# Altium PCB HDC2022.PcbDoc
Units mm, origin at the board's own origin, x right, y up, seen from the top; angles counter-clockwise.
Board outline 25 x 15 mm, 2 copper layers (Top Layer, Bottom Layer), stack 1.569 mm thick; 22 components, 10 nets, 63 pads, 46 vias.
Unrouted connection lines stored in the file: 11.
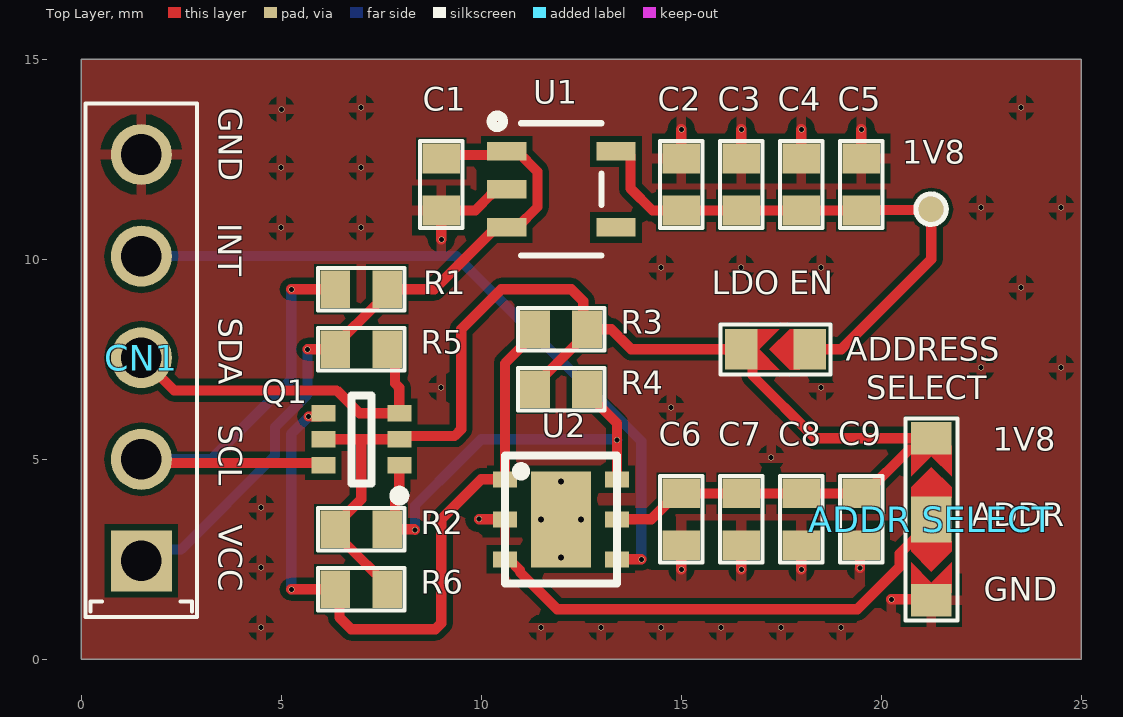
[diagram p0: Top Layer view]
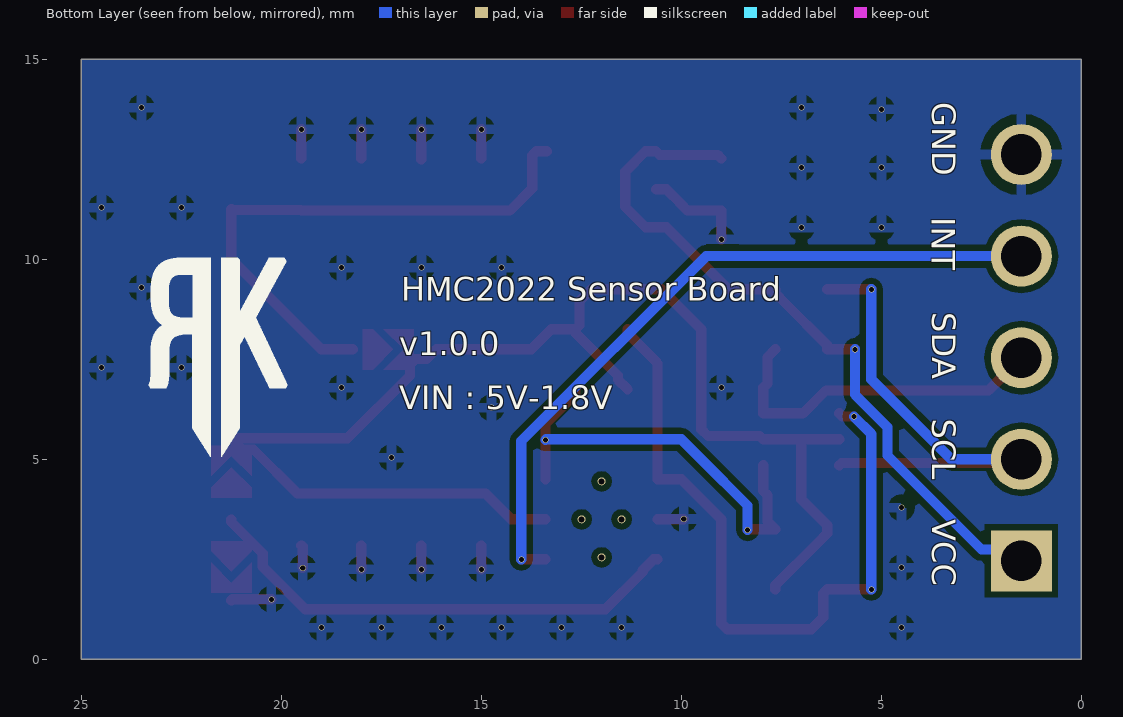
[diagram p1: Bottom Layer view, seen from below]
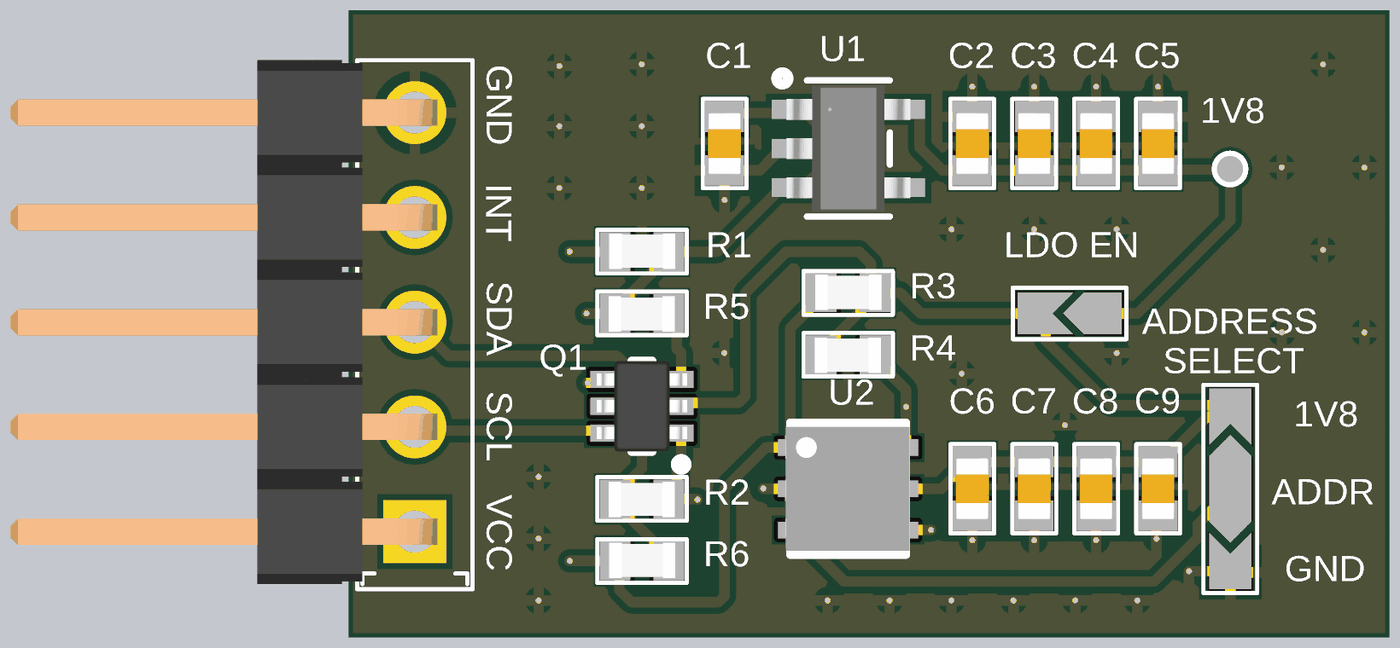
[diagram p2: 3D render of the assembled board from above, using the file's embedded part models]

## Layer stack, top to bottom
Top Solder: solder mask 0.0254, SM-001, Dk 4
Top Layer: signal copper 0.035
Dielectric 1: core 1.4986, Core-043, Dk 4.3
Bottom Layer: signal copper 0.035
Bottom Solder: solder mask 0.0254, SM-001, Dk 4

## Board outline
0,0 25,0 25,15 0,15

## Design rules (kind name [scope] priority, off if disabled: settings)
Clearance [All] p1: gap=0.152 ignorepadtopadclearanceinfootprint=FALSE
PolygonConnect [All] p1: connectstyle=Relief reliefconductorwidth=0.254 reliefentries=4 polygonreliefangle="90 Angle" airgapwidth=0.254
RoutingVias [All] p1: holewidth=0.152 width=0.178 viastyle="Through Hole" minholewidth=0.127 minwidth=0.152 maxholewidth=1.295 maxwidth=1.27
SolderMaskExpansion [All] p1: expansion=0.102 istentingtop=FALSE
Width [All] p1: maxlimit=0.254 minlimit=0.254 preferedwidth=0.254
30 further rules are at their usual default settings.

## Components (designator, comment, footprint, x,y, rotation, side; value= is the part's Value field where it differs from the comment)
1V8 "1v8" TP 21.25,11.25 r90 top (schematic designator TP1)
"ADDR SELECT" "JUMPER_3Pin" "SB_0603 - 3 Pin" 21.25,3.5 r270 top (schematic designator J2)
C1 "1uF" CAP_0603 9,11.871 r90 top
C2 "100nF" CAP_0603 15,11.871 r270 top
C3 "100nF" CAP_0603 16.5,11.871 r270 top
C4 "1uF" CAP_0603 18,11.871 r270 top
C5 "4.7uF" CAP_0603 19.5,11.871 r270 top
C6 "100nF" CAP_0603 15,3.5 r90 top
C7 "100nF" CAP_0603 16.5,3.5 r90 top
C8 "1uF" CAP_0603 18,3.5 r90 top
C9 "4.7uF" CAP_0603 19.5,3.5 r90 top
CN1 "HD_5pin_2.54mm_Male" HD_5pin_2.54mm_male 1.5,10.08 r90 top
"LDO EN" "Jumper" SB_0603 17.358,7.75 r0 top (schematic designator J1)
Q1 "BSS138DW-7-F" DIOD-SOT363-6_V 7,5.5 r180 top
R1 "10K" RES_0603 7,9.25 r0 top
R2 "10K" RES_0603 7,3.25 r180 top
R3 "10K" RES_0603 11.993,8.25 r0 top
R4 "10K" RES_0603 11.994,6.75 r180 top
R5 "10K" RES_0603 7,7.75 r180 top
R6 "10K" RES_0603 7,1.75 r0 top
U1 "TLV74018PDBVR" SOIC_DBVR_TEX 12,11.75 r0 top
U2 "HDC2022DEPR" WSON-6 11.993,3.5 r0 top

## Footprints (in the part's own frame and the unit in brackets; to place one, negate y for a bottom-side part, rotate by r counter-clockwise, add the part's x,y. Pads: shape width x height; smd on the part's side, far side on the other; paste and mask are expansions set on the pad)
CAP_0603 [mm] "Chip Capacitor, 2-Leads, Body 1.50x0.80mm, IPC Medium Density"
  rect 0.74x0.94 smd: 1(-0.65,0) 2(0.65,0)
  silkscreen extent -1.08,-0.53 1.08,0.53, body extent -0.75,-0.4 0.75,0.4, height 0.6
DIOD-SOT363-6_V [mm] "SOT23, 6-Leads, Body 1.35x2.20mm, Pitch 0.65mm"
  rect 0.6x0.42 smd: 1(-0.95,0.65) 2(-0.95,0) 3(-0.95,-0.65) 4(0.95,-0.65) 5(0.95,0) 6(0.95,0.65)
  silkscreen extent -1.08,-1.1 0.25,1.53, body extent -1.1,-1.1 1.1,1.1, height 1.07
HD_5pin_2.54mm_male [mil]
  rect 60x60 hole 40 mask+0: 1(-300,0)
  round 60 hole 40 mask+0: 2(-200,0) 3(-100,0) 4(0,0) 5(100,0)
  silkscreen extent -355,-55 150,55, body extent -350,-22 150,386, height 89
RES_0603 [mm] "Chip Resistor, 2-Leads, Body 1.55x0.80mm, IPC Medium Density"
  rect 0.74x0.94 smd: 1(-0.65,0) 2(0.65,0)
  silkscreen extent -1.08,-0.53 1.08,0.53, body extent -0.79,-0.42 0.81,0.44, height 0.48
SB_0603 [mil] "Jumper"
  rect 32x40 smd mask+1.77: 1(33.75,0) 2(-33.75,0)
  Top Layer region: -26.25,0 -16.25,0 3.75,-20 -26.25,-20
  Top Layer region: -26.25,0 -16.25,0 3.75,20 -26.25,20
  Top Layer region: 23.75,20 13.75,20 -6.25,0 13.75,-20 23.75,-20
  silkscreen extent -54,-25 54,25
"SB_0603 - 3 Pin" [mil] "Jumper"
  rect 32x40 smd mask+1.77: 1(-79.72,0) 3(79.72,0)
  rect 45x40 smd mask+1.77: 2(0.14,0)
  Top Layer region: -21.38,20 -31.38,20 -51.38,0 -31.38,-20 -21.38,-20
  Top Layer region: 21.38,-20 31.38,-20 51.38,0 31.38,20 21.38,20
  Top Layer region: 72.22,0 62.22,0 42.22,-20 72.22,-20
  Top Layer region: 72.22,0 62.22,0 42.22,20 72.22,20
  Top Layer region: -72.22,0 -62.22,0 -42.22,20 -72.22,20
  Top Layer region: -72.22,0 -62.22,0 -42.22,-20 -72.22,-20
  silkscreen extent -99,-26 100,26
SOIC_DBVR_TEX [mil]
  rect 38.5x18 smd paste+0 mask+0: 1(-53.75,37.4) 2(-53.75,0) 3(-53.75,-37.4) 4(53.75,-37.4) 5(53.75,37.4)
  silkscreen extent -69,-65 40,72, body extent -59,-60 59,60, height 57
TP [mil]
  round 30 smd mask+1.97: 1(0,0)
  silkscreen extent -15,-15 15,15
WSON-6 [mm]
  rect 0.6x0.4 smd: 1(-1.4,1) 2(-1.4,0) 3(-1.4,-1) 4(1.4,-1) 5(1.4,0) 6(1.4,1)
  round 0.2 hole 0.15: ""(-0.5,0) ""(0,-0.95) ""(0,0.95) ""(0.5,0)
  rect 1.5x2.4 smd: ""(0,0)
  silkscreen extent -1.4,-1.6 1.4,1.6, body extent -1.52,-1.5 1.5,1.5, height 0.75

## Part data
1V8: library part "Test Point"
C1 C2 C3 C4 C5 C6 C7 C8 C9: library part Capacitor
Q1: library part CMP-2000-05966-2, "Dual N-Channel Enhancement Mode Field Effect Transistor, 50 V, 200 mA, -55 to 150 degC, 6-Pin SOT-363, RoHS, Tape and Reel", Manufacturer=DiodesIncorporated, Maximum Operating Temperature=+150C, Minimum Operating Temperature=-55C, Package / Case=SOT-363-6, Package Description="6-Pin Small Outline Transistor, Body 1.25 x 2 mm, Pitch 0.65 mm", Package Reference=SOT363-6, Pd - Power Dissipation=200mW, Rds On - Drain-Source Resistance=3.5Ohms, Vds - Drain-Source Breakdown Voltage=50V, Vgs - Gate-Source Voltage=20V, Id - Continuous Drain Current=200mA, AccessRights=2147483647, Brand=DiodesIncorporated, Channel Mode=Enhancement, Configuration=Dual, ContentType="Unified Component", ContentTypeGUID=CB3C11C4-E317-11DF-B822-12313F0024A2, Datasheet URL=http://www.diodes.com/_files/datasheets/ds30203.pdf, Datasheet Version="Rev. 13-2, 01/2014", Factory Pack Quantity=3000, Folder="Unified Components\Components\New Releases\New\", FolderGUID=B7F4506A-9127-42E7-A087-46FE7B18D116, Height=1mm, Length=2.2mm, LifeCycle=Released, LifeCycleStateGUID=61E382EE-6656-4F12-9E24-BE9327104A25, Manufacturer URL=http://www.diodes.com/, Mounting Style=SMD/SMT, Mounting Technology=SurfaceMount, Number of Channels=2Channel, Packaging=Reel, Product=MOSFETSmallSignal, Product Category=MOSFET, ReleaseDate="30/08/2017 08:55:44 AM", RevisionId=1, RoHS=True, Series=BSS138, Technology=Si, Transistor Polarity=N-Channel, Transistor Type=2N-Channel, Typical Turn-Off Delay Time=20ns, Typical Turn-On Delay Time=20ns, Unit Weight=0.000212oz, Width=1.35mm, ItemGUID=D038B86C-7A34-4742-AE06-400EAE30903C, ItemHRID=CMP-2000-05966
R1 R2 R3 R4 R5 R6: library part Resistor
U1: Manufacturer="Texas Instruments", Supplier Part Number 1=296-TLV74018PDBVRCT-ND, Manufacturer Part Number=TLV74018PDBVR, Pricing 1="1=0,24000, 10=0,19400, 25=0,16200, 100=0,09000, 250=0,07920, 500=0,06750, 1000=0,04590 (USD)", RoHS=No, Stock 1=4366, Supplier 1=Digi-Key
U2: Manufacturer="Texas Instruments", Supplier Part Number 1=296-HDC2022DEPRCT-ND, Manufacturer Part Number=HDC2022DEPR, Pricing 1="1=4,49000, 5=3,96000, 10=3,49800, 25=2,83800, 50=2,50800, 100=2,44200, 500=2,04600, 1000=1,91400 (USD)", RoHS=No, Stock 1=2745, Supplier 1=Digi-Key
"LDO EN": Published=24-Mar-1999, Publisher="Altium Limited", Revision="July-2002: Re-released for DXP Platform."

## Via types
v1: diameter 0.152, hole 0.127, Top Layer to Bottom Layer, tented both sides, 46 vias

## Nets (pads, with @x,y where several pads share a name; then routed paths per layer and width w, separated by ;. In a path a pad name is that pad's centre, name@x,y a point inside that pad or via, vN(x,y) a via of type N, cw(c..) or ccw(c..) an arc to the next point about the centre after c; other vN are vias at no path point)
1v8: "ADDR SELECT.1" "LDO EN.2" C6.2 C7.2 C8.2 C9.2 Q1.2 Q1.5 R2.2 R3.2 R4.2 R6.2 U2.5 | length 35.6
  Top Layer w0.254: Q1.5 7,5.5 ; R6.2 7.65,1.85 6.593,2.907 6.35,3.15 R2.2 6.35,3.35 7,4 7,5.5 ; R4.2 11.587,6.993 11.587,7.094 12.643,8.15 R3.2 ; U2.5 14.251,3.5 14.9,4.15 C6.2 C7.2 C8.2 C9.2 19.6,4.15 20.696,5.246 20.971,5.246 21.25,5.525 18.349,5.525 16.78,7.095 16.78,7.369 16.638,7.511 16.363,7.511 16.124,7.75 13.75,7.75 13.25,8.25 R3.2 ; 7,5.5 Q1.2 8.033,5.583 9.333,5.583 9.5,5.75 9.5,8.25 10.5,9.25 12.25,9.25 12.548,8.953 12.548,8.345 R3.2
GND: "ADDR SELECT.3" C1.1 C2.1 C3.1 C4.1 C5.1 C6.1 C7.1 C8.1 C9.1 CN1.5 U1.2 U2.2 | length 9.6
  Top Layer w0.254: v1(9,10.5) C1.1 9.851,11.221 10.031,11.4 10.031,11.407 10.375,11.75 U1.2 ; v1(9.939,3.508) 9.946,3.5 U2.2 ; v1(15,2.25) C6.1 ; C2.1 v1(15,13.25) ; v1(16.5,2.25) C7.1 ; C3.1 16.5,12.5 v1(16.5,13.25) ; v1(18,2.25) C8.1 ; C4.1 v1(18,13.25) ; v1(19.465,2.286) 19.465,2.815 C9.1 ; C5.1 v1(19.5,13.25) ; v1(20.25,1.5) 21.225,1.5 21.25,1.475
  other v1: 4.497,0.792 11.497,0.792 12.997,0.792 14.497,0.792 15.997,0.792 17.497,0.792 18.997,0.792 4.497,2.292 4.497,3.792 17.247,5.042 14.747,6.292 8.997,6.792 18.497,6.792 22.497,7.292 24.497,7.292 23.497,9.292 14.497,9.792 16.497,9.792 18.497,9.792 4.997,10.792 6.997,10.792 22.497,11.292 24.497,11.292 4.997,12.292 6.997,12.292 5,13.75 6.997,13.792 23.497,13.792
HDC.INT: CN1.4 U2.4 | length 18
  Top Layer w0.254: U2.4 v1(14,2.5)
  Bottom Layer w0.254: CN1.4 9.377,10.08 14,5.457 v1(14,2.5)
HDC.SCL: Q1.1 R2.1 R4.1 U2.6 | length 11.3
  Top Layer w0.254: Q1.1 7.95,4.209 7.843,4.101 7.843,3.443 R2.1 8.33,3.25 v1(8.344,3.236) ; R4.1 12.644,6.65 13.393,5.901 U2.6
  Bottom Layer w0.254: v1(8.344,3.236) 8.344,3.844 9.5,5 10,5.5 13.382,5.5 v1(13.397,5.486)
HDC.SDA: Q1.4 R3.1 R6.1 U2.1 | length 18.1
  Top Layer w0.254: v1(5.25,1.75) R6.1 6.453,1.648 6.453,1.048 6.75,0.75 8.852,0.75 9,0.899 9,3.5 10,4.5 U2.1 10.593,5.986 ; v1(5.683,6.068) 5.968,6.068 Q1.4 ; 10.593,5.987 10.593,7.4 11.343,8.15 R3.1
  Bottom Layer w0.254: v1(5.25,1.75) 5.25,5.636 v1(5.683,6.068)
NetC2_2: 1V8.1 "LDO EN.1" C2.2 C3.2 C4.2 C5.2 U1.5 | length 14.2
  Top Layer w0.254: U1.5 13.626,12.7 13.728,12.599 13.728,11.773 14.28,11.221 C2.2 C3.2 C4.2 C5.2 19.515,11.236 1V8.1@21.236,11.236 ; 18.215,7.75 19,7.75 21.25,10 1V8.1
NetJ2_2: "ADDR SELECT.2" U2.3 | length 12.4
  Top Layer w0.254: U2.3 10.693,2.5 10.964,2.23 10.964,2.185 11.898,1.25 19.402,1.25 20.463,2.312 20.463,2.646 21.25,3.433 21.25,3.497
SCL: CN1.2 Q1.6 R1.1 | length 12.5
  Top Layer w0.254: CN1.2 1.591,4.909 5.991,4.909 Q1.6 ; v1(5.25,9.25) R1.1
  Bottom Layer w0.254: CN1.2 3.25,5 5.25,7 v1(5.25,9.25)
SDA: CN1.3 Q1.3 R5.1 | length 8.8
  Top Layer w0.254: CN1.3 2.317,6.724 6.382,6.724 6.956,6.15 Q1.3 7.95,6.792 7.843,6.899 7.843,7.558 R5.1
VCC: C1.2 CN1.1 R1.2 R5.2 U1.1 U1.3 | length 18.3
  Top Layer w0.254: v1(5.657,7.75) R5.2 6.35,7.85 7.407,8.907 7.65,9.15 R1.2 8.825,9.25 10.375,10.8 U1.3 10.896,10.8 11.404,11.308 11.404,12.192 10.896,12.7 U1.1 10.545,12.61 9.09,12.61 C1.2
  Bottom Layer w0.254: CN1.1 1.785,2.745 2.495,2.745 4.844,5.094 4.844,5.804 5.657,6.617 v1(5.657,7.75)
pads on no net: U1.4 U2.

## Polygon pours and split planes (outlines as drawn)
GND on Top Layer "GND_L01_P000" (solid, pour order 0): 0,15 0,0 25,0 25,15
GND on Bottom Layer "GND_L02_P002" (solid, pour order 2): 0,15 25,15 25,0 0,0

## Silkscreen, mask and mechanical layers (free items; w line width, h text height)
Top Overlay:
  text "GND" at 3.24,13.785 h1 r270
  text "INT" at 3.229,10.908 h1 r270
  text "SDA" at 3.24,8.537 h1 r270
  text "ADDRESS" at 19.113,7.261 h1
  text "SELECT" at 19.619,6.303 h1
  text "SCL" at 3.24,5.87 h1 r270
  text "1V8" at 22.783,5.011 h1
  text "VCC" at 3.24,3.36 h1 r270
  text "ADDR" at 22.25,3.125 h1
  text "GND" at 22.565,1.261 h1
Bottom Overlay:
  drawing of 2 lines, arcs and shapes, not listed
  text "GND" at 3.926,13.924 h1 r90
  text "INT" at 3.937,11.047 h1 r90
  text "HMC2022 Sensor Board" at 17,8.761 h1
  text "SDA" at 3.926,8.676 h1 r90
  text "v1.0.0" at 17.058,7.408 h1
  text "VIN : 5V-1.8V" at 17.058,6.055 h1
  text "SCL" at 3.926,6.01 h1 r90
  text "VCC" at 3.926,3.499 h1 r90
PCB Outline:
  the board outline again, w0.2

## Text inside footprints (layer, text, board x,y; h text height)
U1: Mechanical 13 "*" at 11.061,11.938 h1.27